# Altium PCB PCB1.PcbDoc
Units mm, origin at the board's own origin, x right, y up, seen from the top; angles counter-clockwise.
Board outline 17.78 x 60.96 mm, 2 copper layers (Top Layer, Bottom Layer), stack 1.595 mm thick; 74 components, 43 nets, 242 pads, 125 vias.
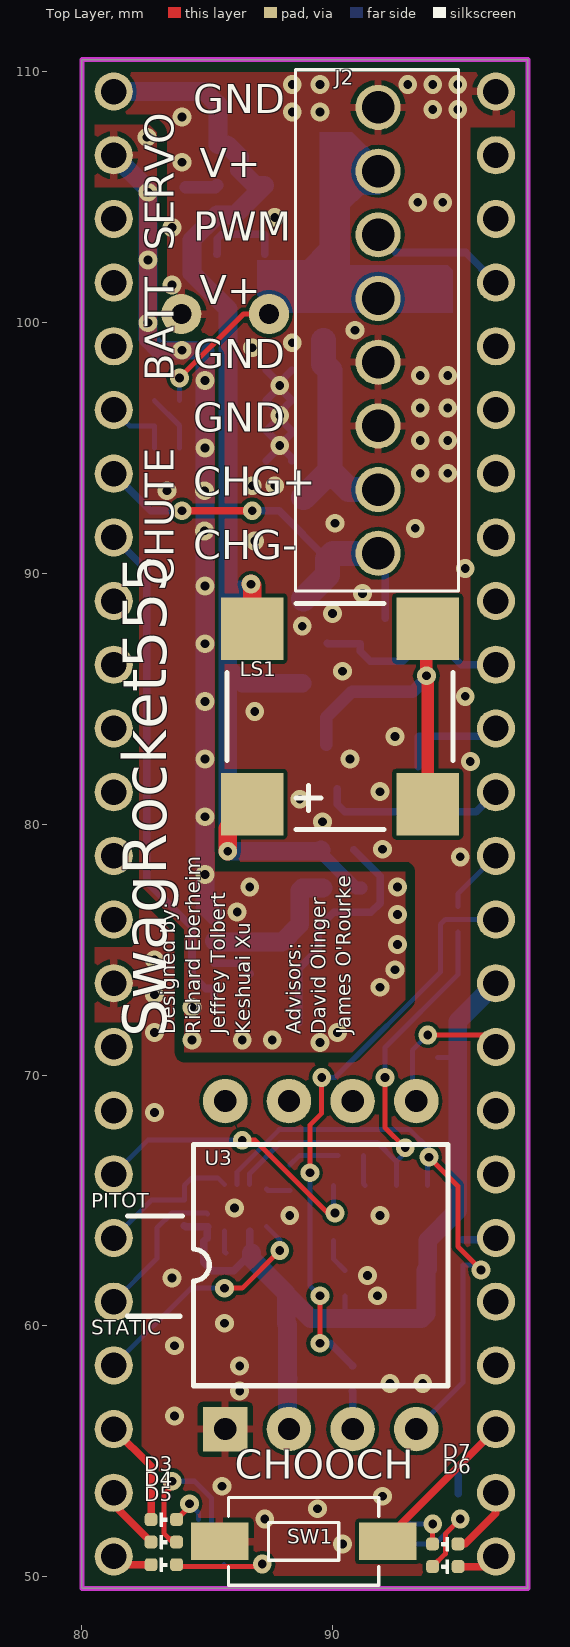
[diagram p0: Top Layer view]
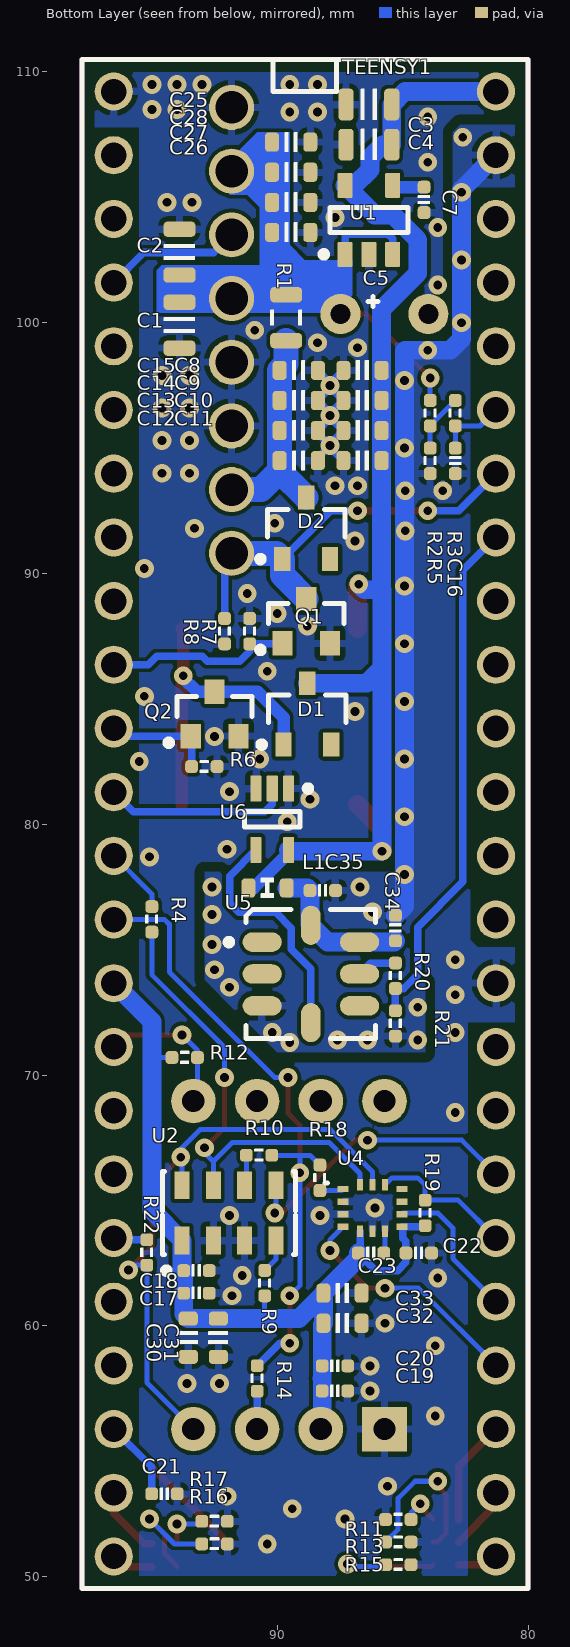
[diagram p1: Bottom Layer view, seen from below]
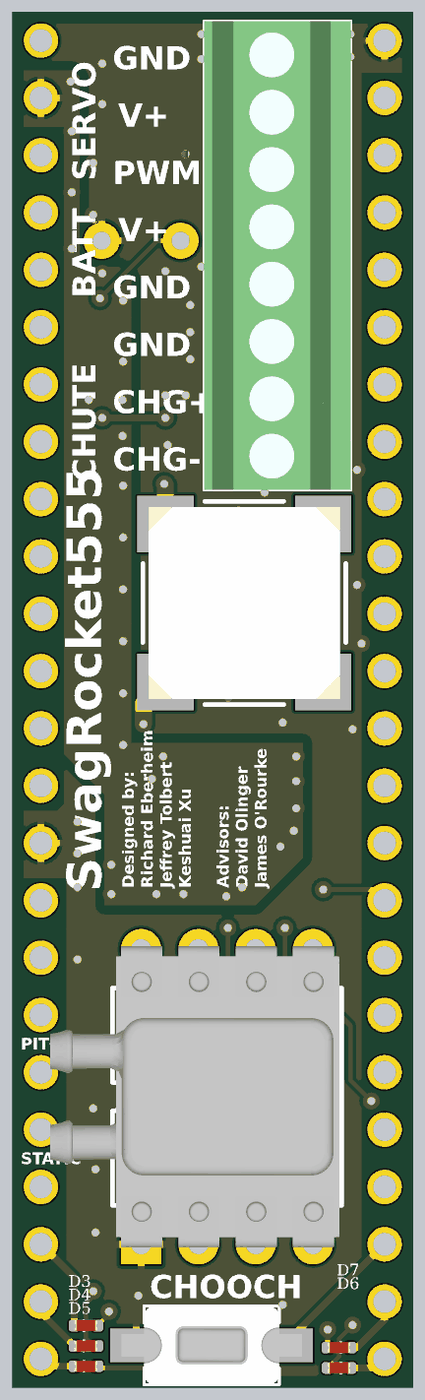
[diagram p2: 3D render of the assembled board from above, using the file's embedded part models]
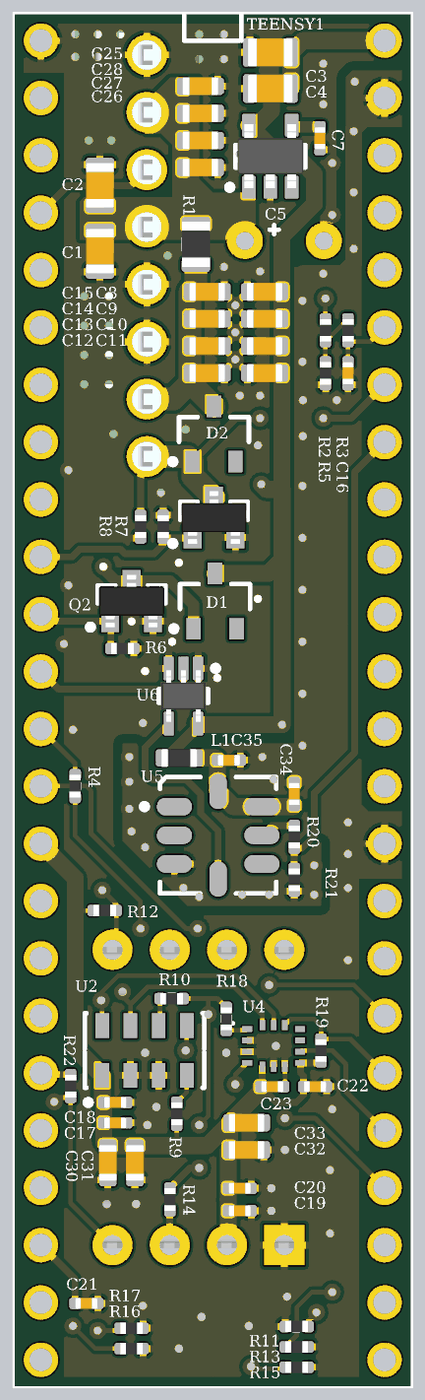
[diagram p3: 3D render of the assembled board from below, using the file's embedded part models]

## Layer stack, top to bottom
Top Solder: solder mask 0.0254, Solder Resist, Dk 3.5
Top Layer: signal copper 0.0356
Dielectric 1: dielectric 1.524, FR-4, Dk 4.8
Bottom Layer: signal copper 0.0356
Bottom Solder: solder mask 0.0102, Solder Resist, Dk 3.5

## Board outline
80.01,49.53 97.79,49.53 97.79,110.49 80.01,110.49

## Design rules (kind name [scope] priority, off if disabled: settings)
BoardOutlineClearance [InNetClass('All Nets')] p1: gap=0.381 ignorepadtopadclearanceinfootprint=FALSE
Clearance BoardEdge [All vs OnLayer('Keep-Out Layer')] p1: gap=0.4 ignorepadtopadclearanceinfootprint=FALSE
Clearance "Stitching GND" [IsStitchingVia and InNet('GND') vs (IsVia and (Not IsStitchingVia)) Or IsPad] p2 off: gap=0.127 ignorepadtopadclearanceinfootprint=FALSE except(0: Arc-Hole Track-Hole SMDPad-Hole THPad-Hole Via-Hole Fill-Hole Poly-Hole Region-Hole Text-Hole)
Clearance Clearance_outlinepolygon [inPolygon vs OnLayer('Keep-Out Layer')] p3 off: gap=0.4 ignorepadtopadclearanceinfootprint=FALSE except(0: Arc-Hole Track-Hole SMDPad-Hole THPad-Hole Via-Hole Fill-Hole Poly-Hole Region-Hole Text-Hole)
Clearance Clearance-polygonpolygon [InPolygon vs InPolygon] p4: gap=0.4 ignorepadtopadclearanceinfootprint=FALSE
Clearance Clearance_2 [All] p5: gap=0.152 ignorepadtopadclearanceinfootprint=FALSE except(0: Arc-Hole Track-Hole SMDPad-Hole THPad-Hole Via-Hole Fill-Hole Poly-Hole Region-Hole Text-Hole)
ComponentClearance [InComponentClass('no-clearance-check')] p1: gap=-999 collisioncheckmode=3 verticalgap=-999 showdistances=FALSE
ComponentClearance ComponentClearance_4 [All] p2: gap=0.254 collisioncheckmode=3 verticalgap=0.254 showdistances=FALSE
HoleSize [All] p1: absolutevalues=TRUE maxlimit=6 minlimit=0.33 maxpercent=80.000 minpercent=20.000
MinimumAnnularRing ignore [(HasFootprint('LMZ21701SIL') OR HasFootprint('m3 hole') OR HasFootprint('G3T-12AH'))] p1: minimumring=0
MinimumAnnularRing [All] p2: minimumring=0.178
MinimumSolderMaskSliver [All] p1: minsoldermaskwidth=0.076
NetAntennae [All] p1: netantennaetolerance=2
PolygonConnect PolygonConnect_heat [IsVia OR InPolygonClass('nothermalrelief') OR InPadClass('heatsink')] p1: connectstyle=Direct reliefconductorwidth=0.254 reliefentries=4 polygonreliefangle="90 Angle" airgapwidth=0.254
PolygonConnect [All] p2: connectstyle=Relief reliefconductorwidth=0.3 reliefentries=4 polygonreliefangle="90 Angle" airgapwidth=0.2
RoutingVias [All] p1: holewidth=0.711 width=1.27 viastyle="Through Hole" minholewidth=0.711 minwidth=1.27 maxholewidth=0.711 maxwidth=1.27 useviatemplates=TRUE viatemplateguid#1={7AE0D67D-3FC4-421B-A70A-BCEE4CC15F0C} viatemplatename#1=signal
SilkToSilkClearance [All] p1 off: silktosilkclearance=0
SilkToSolderMaskClearance SilkToSolderMaskClearance_1 [HasFootprint('PAD-JUMPER-2-NO_YES_SILK')] p1: minsilkscreentomaskgap=0 clearancetoexposedcopper=TRUE
SilkToSolderMaskClearance [IsPad] p2: minsilkscreentomaskgap=0.15 clearancetoexposedcopper=TRUE
SolderMaskExpansion [All] p1: expansion=0.076
Width Width_1 [InNetClass('CI')] p1: maxlimit=10 minlimit=0.15 preferedwidth=0.2 impedancedriven=TRUE minimp=90.000000 maximp=110.000000 favimp=100.000000
Width [All] p2: maxlimit=25.375 minlimit=0.152 preferedwidth=0.3
24 further rules are at their usual default settings.

## Classes and differential pairs
net class CI: MISO MOSI SCK

## Components (designator, comment, footprint, x,y, rotation, side; value= is the part's Value field where it differs from the comment)
C1 "Cap_0805" CAP_0805 93.9,99.9 r90 bottom value=10uf
C2 "Cap_0805" CAP_0805 93.9,102.814 r270 bottom value=10uf
C3 "Cap_0805" CAP_0805 86.346,108.7 r180 bottom value=4.7uf
C4 "Cap_0805" CAP_0805 86.346,107.1 r180 bottom value=4.7uf
C5 "Cap_Tan_2917" OFF_BOARD_CAP_3.5MM 87.475,100.35 r180 bottom value=?F
C7 "Cap_0402" CAP_0402 84.146,104.9 r90 bottom value=10nf
C8 "Cap_0603" CAP_0603 86.6,98.1 r180 bottom value=1uf
C9 "Cap_0603" CAP_0603 86.6,96.9 r180 bottom value=1uf
C10 "Cap_0603" CAP_0603 86.6,95.7 r180 bottom value=1uf
C11 "Cap_0603" CAP_0603 86.6,94.5 r180 bottom value=1uf
C12 "Cap_0603" CAP_0603 89.146,94.5 r0 bottom value=1uf
C13 "Cap_0603" CAP_0603 89.146,95.7 r0 bottom value=1uf
C14 "Cap_0603" CAP_0603 89.146,96.9 r0 bottom value=1uf
C15 "Cap_0603" CAP_0603 89.146,98.1 r0 bottom value=1uf
C16 "Cap_0402" CAP_0402 82.9,94.492 r90 bottom value=?F
C17 "Cap_0402" CAP_0402 93.225,61.3 r0 bottom value=104
C18 "Cap_0402" CAP_0402 93.225,62.2 r0 bottom value=104
C19 "Cap_0402" CAP_0402 87.7,57.4 r0 bottom value=104
C20 "Cap_0402" CAP_0402 87.7,58.4 r0 bottom value=104
C21 "Cap_0402" CAP_0402 94.5,53.3 r180 bottom value=104
C22 "Cap_0402" CAP_0402 84.36,62.9 r0 bottom value=104
C23 "Cap_0402" CAP_0402 86.26,62.9 r0 bottom value=104
C25 "Cap_0603" CAP_0603 89.446,107.2 r0 bottom value=1uf
C26 "Cap_0603" CAP_0603 89.446,103.6 r0 bottom value=1uf
C27 "Cap_0603" CAP_0603 89.446,104.8 r0 bottom value=1uf
C28 "Cap_0603" CAP_0603 89.446,106 r0 bottom value=1uf
C30 "Cap_0603" CAP_0603 93.55,59.525 r90 bottom value=1uf
C31 "Cap_0603" CAP_0603 92.35,59.525 r90 bottom value=1uf
C32 "Cap_0603" CAP_0603 87.4,60.1 r0 bottom value=1uf
C33 "Cap_0603" CAP_0603 87.4,61.3 r0 bottom value=1uf
C34 "Cap_0402" CAP_0402 85.286,75.858 r270 bottom value=104
C35 "Cap_0402" CAP_0402 88.186,77.358 r0 bottom value=104
D1 "Diode_SOD523" SOT95P240X120-3N 88.8,84.4 r90 bottom
D2 "Diode_SOD523" SOT95P240X120-3N 88.846,91.8 r90 bottom
D3 "LED_0402" LED_0402_RED 83.275,52.275 r0 top
D4 "LED_0402" LED_0402_RED 83.275,51.375 r0 top
D5 "LED_0402" LED_0402_RED 83.275,50.475 r0 top
D6 "LED_0402" LED_0402_RED 94.5,50.4 r180 top
D7 "LED_0402" LED_0402_RED 94.5,51.3 r180 top
J2 "691210910008" 691210910008 91.821,99.695 r270 top
L1 "Ind_0603" IND_0603 90.386,77.458 r180 bottom value=?H
LS1 "Buzzer CUI CSSJ4B20" "CUI Buzzer 8.5" 86.8,80.8 r90 top
Q1 "INFINEON MOSFET N-CH SOT-23-3" "INFINEON SOT-23-3" 88.846,88.1 r90 bottom
Q2 "INFINEON MOSFET N-CH SOT-23-3" "INFINEON SOT-23-3" 92.5,84.4 r90 bottom
R1 "Res_0805" RES_0805 89.646,100.2 r90 bottom value=4.7R
R2 "Res_0402" RES_0402 83.9,96.392 r90 bottom value=?K
R3 "Res_0402" RES_0402 82.9,96.392 r90 bottom value=?K
R4 "Res_0402" RES_0402 95,76.208 r270 bottom value=100R
R5 "Res_0402" RES_0402 83.9,94.492 r90 bottom value=?K
R6 "Res_0402" RES_0402 92.908,82.3 r0 bottom value=20K
R7 "Res_0402" RES_0402 91.1,87.7 r270 bottom value=20K
R8 "Res_0402" RES_0402 92.1,87.7 r90 bottom value=100k
R9 "Res_0402" RES_0402 90.5,61.7 r270 bottom value=20k
R10 "Res_0402" RES_0402 90.725,66.8 r180 bottom value=100R
R11 "Res_0402" RES_0402 85.175,52.275 r180 bottom value=?K
R12 "Res_0402" RES_0402 93.692,70.7 r0 bottom value=20k
R13 "Res_0402" RES_0402 85.175,51.375 r0 bottom value=?K
R14 "Res_0402" RES_0402 90.8,57.9 r90 bottom value=100R
R15 "Res_0402" RES_0402 85.175,50.475 r0 bottom value=?K
R16 "Res_0402" RES_0402 92.5,51.3 r0 bottom value=?K
R17 "Res_0402" RES_0402 92.5,52.2 r0 bottom value=?K
R18 "Res_0402" RES_0402 88.3,65.9 r90 bottom value=100R
R19 "Res_0402" RES_0402 84.1,64.5 r270 bottom value=20k
R20 "Res_0402" RES_0402 85.286,73.958 r270 bottom value=49.9k
R21 "Res_0402" RES_0402 85.286,72.058 r90 bottom value=33.2k
R22 "Res_0402" RES_0402 95.2,62.925 r270 bottom value=100R
SW1 "434121050816" 434121050816 88.85,51.4 r0 top
TEENSY1 "Teensy3.6 edge only" TEENSY3.6-EDGEONLY 96.52,109.22 r180 bottom locked
U1 "LP2992IM5-5.0" DBV0005A_N 86.346,104.1 r90 bottom
U2 "MS5607/5611" MS5611 91.925,64.5 r90 bottom
U3 "HSCDRRN160MDSA3" honeywell-hsc-DIP8 89.535,62.42 r90 top
U4 "LSM6DSM" LGA14L_DOT_INDICATOR 86.2,64.7 r180 bottom
U5 "ADXL78/AD22279" ADI-E-8-1_V 88.66,74.03 r180 bottom
U6 "CAHCT1G125QDCKRG4Q" DCK0005A_M 90.2,80.2 r270 bottom

## Footprints (in the part's own frame and the unit in brackets; to place one, negate y for a bottom-side part, rotate by r counter-clockwise, add the part's x,y. Pads: shape width x height; smd on the part's side, far side on the other; paste and mask are expansions set on the pad)
434121050816 [mm] "6.0*3.5mm vertical type, SMD, height 5.0mm, black actuator, 160gf, T&R"
  rect 2.3x1.5 smd: 1(-3.35,0) 2(3.35,0)
  silkscreen extent -3,-1.75 3,1.75, body extent -4,-1.75 4,1.75, height 5
691210910008 [mm] "2,54mm - modular - green - Horizontal wire entry - Cage clamp - 0,8mm2 wires - 08p"
  round 1.8 hole 1.3: 1(-8.89,0) 2(-6.35,0) 3(-3.81,0) 4(-1.27,0) 5(1.27,0) 6(3.81,0) 7(6.35,0) 8(8.89,0)
  silkscreen extent -10.39,-3.3 10.39,3.2, body extent -10.39,-3.3 10.39,3.2, height 8.75
ADI-E-8-1_V [mm] "LCC, 8-Leads, Body 5x5mm, Pitch 1.27mm"
  oval 1.56x0.78 smd: 1(-1.94,1.27) 2(-1.94,0) 3(-1.94,-1.27) 5(1.94,-1.27) 6(1.94,0) 7(1.94,1.27)
  oval 0.78x1.56 smd: 4(0,-1.94) 8(0,1.94)
  silkscreen extent -3.4,-2.58 2.58,2.58, body extent -2.5,-2.5 2.5,2.5, height 2.21
CAP_0402 [mil]
  rrect50% 20x20 smd: 1(-20,0) 2(20,0)
  silkscreen extent -7,-9 7,9, body extent -20,-10 20,10, height 20
CAP_0603 [mil]
  rrect50% 22x30 smd: 1(-30,0) 2(30,0)
  silkscreen extent -10,-15 10,15, body extent -31,-16 31,16, height 31
CAP_0805 [mil]
  rrect50% 24x50 smd: 1(-36,0) 2(36,0)
  silkscreen extent -12,-24 12,24, body extent -39,-25 39,25, height 39
"CUI Buzzer 8.5" [mm]
  rect 2.5x2.5 smd: 1(0,0) 2(0,-7) 3(7,-7) 4(7,0)
  silkscreen extent -1,-8 8,1, body extent -0.75,-7.75 7.75,0.75, height 3.2
DBV0005A_N [mm] "SOT23, 5-Leads, Body 3.05x1.75mm, Pitch 0.95mm, IPC Medium Density"
  rrect17% 1x0.6 smd: 1(-1.375,0.95) 2(-1.375,0) 3(-1.375,-0.95) 4(1.375,-0.95) 5(1.375,0.95)
  silkscreen extent -1.5,-1.55 0.5,1.93, body extent -1.42,-1.46 1.42,1.46, height 1.08
DCK0005A_M [mm] "SOT23, 5-Leads, Body 2.15x1.4mm, Pitch 0.65mm, IPC Low Density"
  rrect22% 1.05x0.45 smd mask+0.06: 1(-1.225,0.65) 2(-1.225,0) 3(-1.225,-0.65) 4(1.225,-0.65) 5(1.225,0.65)
  silkscreen extent -1.35,-1.1 0.3,1.55, body extent -1.14,-1 1.14,1, height 0.94
honeywell-hsc-DIP8 [mil]
  rect 70x70 hole 35: 1(-257.5,150)
  round 70 hole 35: 2(-257.5,50) 3(-257.5,-50) 4(-257.5,-150) 5(257.5,-150) 6(257.5,-50) 7(257.5,50) 8(257.5,150)
  silkscreen extent -190,-200 190,304, body extent -263,-196 263,309, height 287
IND_0603 [mil]
  rrect50% 22x30 smd: 1(-30,0) 2(30,0)
  silkscreen extent -10,-15 10,15, body extent -31,-16 31,16, height 31
"INFINEON SOT-23-3" [mm] "SOT23, 3-Leads, Body 2.90x2.40mm, Pitch 0.95mm, IPC Medium Density"
  rect 0.972x0.802 smd: 1(-0.885,0.95) 2(0.885,0) 3(-0.885,-0.95)
  silkscreen extent -1.27,-1.5 0.7,1.95, body extent -1.16,-1.45 1.16,1.45, height 1
LED_0402_RED [mil]
  rrect50% 20x20 smd: 1(-20,0) 2(20,0)
  silkscreen extent -6,-11 6,10, body extent -20,-10 20,10, height 18
LGA14L_DOT_INDICATOR [mm] "LGA14L_DOT_INDICATOR"
  rect 0.45x0.25 smd: 1(-1.175,0.75) 2(-1.175,0.25) 3(-1.175,-0.25) 4(-1.175,-0.75) 8(1.175,-0.75) 9(1.175,-0.25) 10(1.175,0.25) 11(1.175,0.75)
  rect 0.25x0.45 smd: 5(-0.5,-0.925) 6(0,-0.925) 7(0.5,-0.925) 12(0.5,0.925) 13(0,0.925) 14(-0.5,0.925)
  silkscreen extent -1.9,1 -1.8,1, body extent -1.5,-1.25 1.5,1.25, height 0.83
MS5611 [mm] "QFN, 8-Leads, Body 3.00x5.00mm, Pitch 1.25mm, Thermal Pad 0.00x0.00mm, IPC Medium Density"
  rect 1.1x0.6 smd: 1(-1.1,1.875) 2(-1.1,0.625) 3(-1.1,-0.625) 4(-1.1,-1.875) 5(1.1,-1.875) 6(1.1,-0.625) 7(1.1,0.625) 8(1.1,1.875)
  silkscreen extent -2.42,-2.65 1.65,2.65, body extent -1.5,-2.5 1.5,2.5, height 1
OFF_BOARD_CAP_3.5MM [mm]
  round 1.6 hole 0.8: 1(0,0) 2(3.5,0)
  silkscreen extent 1.1,0.3 1.5,0.7
RES_0402 [mil]
  rrect50% 20x20 smd: 1(-20,0) 2(20,0)
  silkscreen extent -7,-10 7,10, body extent -20,-10 20,10, height 14
RES_0805 [mil]
  rrect50% 24x50 smd: 1(-36,0) 2(36,0)
  silkscreen extent -12,-24 12,24, body extent -39,-25 39,25, height 24
SOT95P240X120-3N [mm] "SOT23, 3-Leads, Body 2.93x2.40mm, Pitch 0.95mm, IPC Medium Density"
  rect 0.95x0.65 smd: 1(-1.225,0.95) 2(-1.225,-0.95) 3(1.225,0)
  silkscreen extent -1.35,-1.55 0.75,1.95, body extent -0.75,-1.56 0.75,1.57, height 1.2
TEENSY3.6-EDGEONLY [mil]
  round 60 hole 40: 0(0,-100) 1(0,-200) 2(0,-300) 3(0,-400) 3.3V1(0,-1400) 3.3V2(600,-200) 4(0,-500) 5(0,-600) 6(0,-700) 7(0,-800) 8(0,-900) 9(0,-1000) 10(0,-1100) 11(0,-1200) 12(0,-1300) 13(600,-1300) 14(600,-1200) 15(600,-1100) 16(600,-1000) 17(600,-900) 18(600,-800) 19(600,-700) 20(600,-600) 21(600,-500) 22(600,-400) 23(600,-300) 24(0,-1500) 25(0,-1600) 26(0,-1700) 27(0,-1800) 28(0,-1900) 29(0,-2000) 30(0,-2100) 31(0,-2200) 32(0,-2300) 33(600,-2300) 34(600,-2200) 35(600,-2100) 36(600,-2000) 37(600,-1900) 38(600,-1800) 39(600,-1700) A21(600,-1600) A22(600,-1500) AGND(600,-100) GND1(0,0) GND2(600,-1400) VIN(600,0)
  silkscreen extent -50,-2350 650,50, body extent -50,-2350 650,50, height 602

## Part data
C1 C2 C3 C4 C5 C7 C8 C9 C10 C11 C12 C13 C14 C15 C16 C17 C18 C19 C20 C21 C22 C23 C25 C26 C27 C28 C30 C31 C32 C33 C34 C35: "Capacitor"
D1 D2: "Diode", url=http://www.digikey.com/product-detail/en/nxp-usa-inc/PMEG2010AEB,115/568-6502-1-ND/2531789
D3 D4 D5 D6 D7: "LED"
J2: "WR-TBL Terminal Blocks Serie 2109 - 2.54 mm with Rising Cage Clamp", Manufacturer="Würth Elektronik eiSos GmbH", ComponentLink1 Description=Manufacturer, ComponentLink1URL=http://www.we-online.com, ComponentLink2 Description=Datasheet, ComponentLink2URL=http://katalog.we-online.de/em/datasheet/6912109100xx.pdf, Created by="Karrer Zheng", Created Date="8 Novenber 2013", NoPins=8, partNo=691210910008
L1: "Inductor"
LS1: library part CSS-J4B20
R1 R2 R3 R4 R5 R6 R7 R8 R9 R10 R11 R12 R13 R14 R15 R16 R17 R18 R19 R20 R21 R22: "Resistor"
SW1: library part CMP-1459-00007-1, "WS-TASV SMD Tact Switch 6.0X3.5 mm", Manufacturer="Wuerth Elektronik", ComponentLink1Description="Manufacturer URL", ComponentLink1URL=http://www.we-online.com, ComponentLink2Description=Datasheet, ComponentLink2URL=http://katalog.we-online.de/em/datasheet/434121050816.pdf, NoPins=02, PackageReference=434121050816, PartNumber=434121050816
U1: library part CMP-0062-02178-3, "Micropower 250 mA Low-Noise Ultra Low-Dropout Regulator, 5-pin SOT-23", Manufacturer="Texas Instruments", PackageTopMarking=LFFB*XTT, PowerWise=N, ComponentLink1Description="Datasheet URL", ComponentLink1URL=http://www.ti.com/general/docs/lit/getliterature.tsp?genericPartNumber=LP2992&fileType=pdf, CompType="LDO IC", PackageDescription="Molded SOT-23, .115 x .063 x .040 in Body, 5 Lead, .0375 in Pitch", PackageReference=DBV0005A, PinCount=5, RoHS=N
U2: library part MS5611
U3: library part honeywell-hsc-spi
U4: library part LSM6DS3
U5: library part ADXL78
U6: library part CMP-0859-00347-3, "Automotive Catalog Single Bus Buffer Gate With 3-State Output, DCK0005A, LARGE T&R", F @ Nom Voltage(Max)(Mhz)=75, Generic Part Number=SN74AHCT1G125-Q1, ICC @ Nom Voltage(Max)(mA)=0.01, Manufacturer="Texas Instruments", Operating Temperature Range(C)="-40 to 125", Rating=Automotive, tpd @ Nom Voltage(Max)(ns)=6, Voltage(Nom)(V)=5, 3-State Output=Yes, Bits(#)=1, DatasheetVersion=SCLS504B, Input Type=CMOS, Logic=True, Output Drive (IOL/IOH)(Max)(mA)=8/-8, Output Type=CMOS, PackageReference=DCK0005A, PartId=1, Schmitt Trigger=No, Sub-Family="Non-Inverting Buffer/Driver", Technology Family=AHCT, VCC(Max)(V)=5.5, VCC(Min)(V)=3

## Via types
v1: diameter 0.75, hole 0.35, Top Layer to Bottom Layer, tented both sides, 125 vias

## Nets (pads, with @x,y where several pads share a name; then routed paths per layer and width w, separated by ;. In a path a pad name is that pad's centre, name@x,y a point inside that pad or via, vN(x,y) a via of type N, cw(c..) or ccw(c..) an arc to the next point about the centre after c; other vN are vias at no path point)
ADXL_OUT: R20.2 R21.2 TEENSY1.19 | length 20.7
  Bottom Layer w0.3: TEENSY1.19 82.6,90.12 82.6,77.7 84.4,75.9 84.4,74 84.95,73.45 R20.2 R21.2
ADXL_ST: TEENSY1.10 U6.2 | length 7.4
  Bottom Layer w0.3: U6.2 90.2,80.8 90.5,80.5 95.74,80.5 TEENSY1.10
AGND: C16.1 C34.1 C35.1 R5.1 R21.1 TEENSY1.AGND U5.3 | length 33.1
  Bottom Layer w0.5: 84.907,93.984 84.923,94
  Bottom Layer w0.75: TEENSY1.AGND 82.648,105.312 v1(82.648,105.2) v1(82.648,102.5) v1(82.648,100) 82.648,99.352 83.1,98.9 v1(84,98.9) 84.9,98.9 84.923,98.877 v1(84.923,97.7) v1(84.923,95) 84.923,94 v1(84.923,89.5) v1(84.923,87.2) v1(84.923,84.9) v1(84.923,82.6) v1(84.923,80.3) v1(84.923,78) 84.923,76.729 C34.1
  other v1: 89.5,71.3 84.4,71.4 86.4,71.4 87.6,71.4 90.2,71.7 84.4,72.7 91.9,73.5 92.5,74.2 92.6,75.2 92.6,76.4 86.2,76.5 86.7,77.5 92.6,77.5 84.9,91.7 83.4,93.3 84.9,93.3 82.6,107.4
BUTTON1: C21.1 SW1.2 TEENSY1.30 | length 9.8
  Top Layer w0.3: SW1.2 92.2,51.56 TEENSY1.30 TEENSY1.30@96.52,55.52
  Bottom Layer w0.3: C21.1 95.008,54.368 TEENSY1.30
BUZZ: Q2.1 R6.2 TEENSY1.9 | length 4.4
  Bottom Layer w0.3: R6.2 93.416,83.481 Q2.1 96.215,83.515 TEENSY1.9
CHARGE: Q1.1 R7.2 TEENSY1.8 | length 7.4
  Bottom Layer w0.3: Q1.1 89.819,87.192 R7.2 91.1,86.9 91.5,86.5 92.8,86.5 93,86.7 94.8,86.7 95.14,86.36 TEENSY1.8
CHARGE_SENSE: D2.1 J2.8 Q1.2 R8.2 TEENSY1.20 | length 16.7
  Top Layer w0.3: v1(84,92.5) v1(86.8,92.5)
  Bottom Layer w0.3: TEENSY1.20 82.76,92.5 v1(84,92.5) ; v1(86.8,92.5) 87.871,92.5 D2.1 ; J2.8 92.1,90.526 R8.2
  Bottom Layer w1: Q1.2 89.796,89.935 D2.1 90.026,90.805 J2.8
CS_HSC: R12.1 TEENSY1.24 U3.5 | length 5.9
  Top Layer w0.2: v1(93.8,71.6) 96.04,71.6 TEENSY1.24
  Bottom Layer w0.2: U3.5 93.184,69.122 R12.1 93.184,70.984 v1(93.8,71.6)
CS_LSM: R19.1 TEENSY1.38 U4.12 | length 5.9
  Bottom Layer w0.2: TEENSY1.38 82.788,65.008 R19.1 84.1,65.6 84.4,65.9 85.425,65.9 U4.12
CS_MS: R9.1 TEENSY1.39 U2.4 U2.5 | length 13.1
  Top Layer w0.2: v1(86.4,67.4) 86.913,67.4 89.813,64.5 v1(90.1,64.5)
  Bottom Layer w0.2: TEENSY1.39 82.64,67.4 v1(86.4,67.4) ; U2.4 90.05,62.658 R9.1 ; U2.5 90.05,64.55 v1(90.1,64.5)
GND: C1.1 C2.1 C3.1 C4.1 C5.2 C7.1 C8.1 C9.1 C10.1 C11.1 C12.1 C13.1 C14.1 C15.1 C17.1 C18.1 C19.1 C20.1 C21.2 C22.1 C23.1 C25.1 C26.1 C27.1 C28.1 C30.1 C31.1 C32.1 C33.1 J2.1 J2.5 J2.6 Q1.3 Q2.3 R6.1 R7.1 R8.1 R11.1 R13.1 R15.1 R16.1 R17.1 SW1.1 TEENSY1.GND1 TEENSY1.GND2 U1.2 U2.2 U2.3 U3.1 U4.2 U4.3 U4.6 U4.7 U6.1 U6.3 | length 10.4
  Bottom Layer w0.2: U4.7 85.7,62.952 C23.1
  Bottom Layer w0.3: C11.1 87.9,95.038 v1(87.9,95.1) ; C8.1 v1@87.9,97.562 ; C12.1 88.384,94.616 v1(87.9,95.1) ; C15.1 87.9,97.616 v1@87.9,97.562 ; v1(87.9,95.1) 88.384,95.584 C13.1 87.9,96.184 v1@87.9,96.238 ; v1(87.9,95.1) 87.9,95.162 C10.1 v1@87.9,96.238 ; v1@87.9,96.238 v1(87.9,96.3) v1@87.9,96.362 ; v1@87.9,96.362 87.9,96.416 C14.1 87.9,97.384 v1@87.9,97.438 ; v1@87.9,96.362 C9.1 v1@87.9,97.438 ; v1@87.9,97.438 v1(87.9,97.5) v1@87.9,97.562
  other v1: 90.4,51.3 87.3,52.3 89.4,52.7 92,53.2 85.6,53.6 83.7,56.4 86.3,57.4 92.3,57.7 93.6,57.7 86.3,58.4 83.7,59.2 85.7,60.1 91.8,61.2 83.6,61.9 91.4,62 88.3,64.4 91.9,64.4 86.1,64.7 82.9,68.5 82.9,71.7 82.9,73.2 82.9,74.6 95.1,78.7 92,79 89.6,80.1 88.7,81 91.9,81.3 95.5,82.5 90.7,82.6 92.5,83.5 86.9,84.5 95.3,85.1 90.4,86.1 88.8,87.9 90,88.4 91.2,89.2 95.3,90.2 86.9,91.3 93.3,91.8 90.1,92 86.8,93.5 87.7,93.5 93.5,94 94.6,94 93.5,95.3 94.6,95.3 93.5,96.6 94.6,96.6 93.5,97.9 94.6,97.9 86.8,99 88.4,99.2 90.9,99.7 83.6,101.5 83.6,103.8 87.7,104.2 93.4,104.8 94.4,104.8 84,106.4 84,108.2 88.4,108.4 89.5,108.4 94,108.5 95,108.5 88.4,109.5 89.5,109.5 93,109.5 94,109.5 95,109.5
LED1: D3.1 TEENSY1.35 | length 4.2
  Top Layer w0.3: TEENSY1.35 82.767,54.393 D3.1
LED2: D4.1 TEENSY1.34 | length 2.6
  Top Layer w0.3: TEENSY1.34 81.28,52.862 D4.1
LED3: D5.1 TEENSY1.33 | length 1.6
  Top Layer w0.3: TEENSY1.33 81.605,50.475 D5.1
LED4: D6.1 TEENSY1.32 | length 1.7
  Top Layer w0.3: D6.1 96.12,50.4 TEENSY1.32
LED5: D7.1 TEENSY1.31 | length 2.8
  Top Layer w0.3: D7.1 95.3,51.3 96.52,52.52 TEENSY1.31
LSM_INT1: TEENSY1.36 U4.4 | length 9.7
  Top Layer w0.2: v1(85.7,61.5) 86.4,61.5 v1(87.9,63)
  Bottom Layer w0.2: TEENSY1.36 84.36,61.5 v1(85.7,61.5) ; U4.4 87.9,63.425 v1(87.9,63)
LSM_INT2: TEENSY1.37 U4.9 | length 5.9
  Bottom Layer w0.2: TEENSY1.37 83,62.68 83,63.9 83.598,64.498 84.977,64.498 U4.9
MISO: R10.2 R14.2 R18.2 TEENSY1.12 | length 26.7
  Top Layer w0.2: v1(89.1,66.1) 89.1,68 89.57,68.47 v1(89.57,69.9) ; v1(89.5,59.3) v1(89.5,61.2)
  Bottom Layer w0.2: R18.2 88.692,66.8 89.1,66.8 ; v1(89.5,61.2) 89.1,61.6 v1(89.1,66.1) 89.1,66.8 ; v1(89.57,69.9) 90.1,69.9 94.3,74.1 94.3,76 94.506,76.206 96.52,76.206 TEENSY1.12 TEENSY1.12@95.87,76.2 ; R10.2 89.1,66.8
  Bottom Layer w0.3: v1(89.5,59.3) 89.908,59.3 R14.2
MOSI: R4.2 U2.7 U4.14 | length 18.9
  Top Layer w0.2: v1(92.1,69.9) 92.1,67.9 v1(92.9,67.1)
  Bottom Layer w0.2: U4.14 86.7,66.075 87.931,67.306 91.794,67.306 92.55,66.55 ; v1(92.1,69.9) 92.1,71.1 95,74 R4.2 ; U2.7 92.55,66.55 ; v1(92.9,67.1) 92.9,66.9 92.55,66.55
NetC7_2: C7.2 U1.4 | length 1.3
  Bottom Layer w0.5: C7.2 85.329,105.408 U1.4
NetC12_2: C12.2 C13.2 C14.2 C15.2 D2.3 J2.7 R1.1 | length 9
  Bottom Layer w1: D2.3 89.908,94.087 ; R1.1 89.646,98.362 C15.2 C14.2 C13.2 C12.2 89.908,94.087 ; J2.7 90.65,93.345 89.908,94.087
NetD1_1: D1.1 LS1.2 LS1.3 Q2.2 | length 12.9
  Top Layer w0.5: LS1.2 93.8,85.875 v1(93.75,85.925) 93.75,87.75 LS1.3
  Bottom Layer w0.5: D1.1 89.75,84.25 90.785,85.285 Q2.2 93.21,85.285 93.75,85.825 v1(93.75,85.925)
NetD3_2: D3.2 R11.2 | length 1.6
  Top Layer w0.2: D3.2 84.3,52.792 v1(84.3,52.9)
  Bottom Layer w0.2: v1(84.3,52.9) 84.667,52.533 R11.2
NetD4_2: D4.2 R13.2 | length 6.7
  Top Layer w0.2: v1(83.6,53.8) 83.6,53.6 83.277,53.277 83.277,51.723 83.625,51.375 D4.2
  Bottom Layer w0.2: v1(83.6,53.8) 84.5,53.8 85.177,53.123 85.177,51.881 R13.2
NetD5_2: D5.2 R15.2 | length 4.9
  Top Layer w0.2: D5.2 83.86,50.398 87.098,50.398 v1(87.2,50.5)
  Bottom Layer w0.2: R15.2 85.758,50.4 v1@87.1,50.4
NetD6_2: D6.2 R16.2 | length 4.9
  Top Layer w0.2: D6.2 94.5,50.908 94.5,51.7 v1(95.1,52.3)
  Bottom Layer w0.2: R16.2 94.1,51.3 v1(95.1,52.3)
NetD7_2: D7.2 R17.2 | length 1.8
  Top Layer w0.2: D7.2 93.992,52.092 v1(94,52.1)
  Bottom Layer w0.2: R17.2 93.108,52.1 v1(94,52.1)
NetR2_1: R2.1 R3.2 R5.2 | length 2.3
  Bottom Layer w0.2: R3.2 83.9,95.9 R2.1 R5.2
NetR4_1: R4.1 TEENSY1.11 | length 2.7
  Bottom Layer w0.2: R4.1 95,77.22 TEENSY1.11
NetR10_1: R10.1 U2.6 | length 1.2
  Bottom Layer w0.2: R10.1 91.233,65.667 U2.6
NetR14_1: R14.1 U3.3 | length 1.5
  Bottom Layer w0.3: R14.1 90.805,57.387 U3.3
NetR18_1: R18.1 U4.1 | length 0.9
  Bottom Layer w0.2: 87.908,65.392 R18.1
  Bottom Layer w0.203: U4.1 87.433,65.392 87.908,65.392
NetR20_1: R20.1 U5.6 | length 1.6
  Bottom Layer w0.3: R20.1 86.284,74.466 U5.6
NetR22_1: R22.1 TEENSY1.27 | length 1.3
  Bottom Layer w0.3: R22.1 96.453,63.433 TEENSY1.27
NetU5_4: U5.4 U6.4 | length 9.5
  Bottom Layer w0.3: U5.4 88.66,74.232 89.436,75.008 89.436,75.858 90.061,76.483 91.536,76.483 91.9,76.847 91.9,77.925 U6.4
SCK: R22.2 U2.8 U3.4 U4.13 | length 24.1
  Top Layer w0.2: v1(93.85,66.725) 95,65.575 95,63.158 v1(95.93,62.228)
  Bottom Layer w0.2: U4.13 86.2,66.141 87.879,67.82 93.08,67.82 93.85,67.05 v1(93.85,66.725) 93.8,66.675 U2.8 ; U3.4 95.2,57.735 R22.2 95.733,62.417 95.922,62.228 v1(95.93,62.228)
SERVO: J2.3 TEENSY1.2 | length 5.5
  Bottom Layer w0.3: J2.3 92.526,102.8 95.32,102.8 TEENSY1.2
VCC: C17.2 C18.2 C19.2 C20.2 C22.2 C23.2 C30.2 C31.2 C32.2 C33.2 R9.2 R12.2 R19.2 TEENSY1.3.3V1 TEENSY1.3.3V2 U2.1 U3.2 U4.5 U4.8 | length 35.4
  Bottom Layer w0.2: 90.5,60.287 R9.2 ; R12.2 95,70.7
  Bottom Layer w0.3: R19.2 84.142,63.95 U4.8 85,63.925 85,63.5 84.868,63.368 C22.2 84.868,62.532 85.2,62.2 86.068,62.2 C23.2 86.7,62.968 U4.5
  Bottom Layer w0.75: C23.2 86.768,62.694 C33.2 C33.2@88.162,61.262 ; 88.225,57.9 88.208,57.917 ; U3.2 88.208,55.937 C19.2 88.208,57.917 ; TEENSY1.3.3V1 95,72.14 95,70.7 95,64.6 U2.1 93.8,62.267 C18.2 C17.2 93.733,60.47 C30.2 C31.2 90.5,60.287 89.137,60.287 C33.2@88.162,61.262 ; C33.2@88.162,61.262 C32.2 88.208,60.054 C20.2 88.208,57.917
VCC_5: C3.2 C4.2 C8.2 C9.2 C10.2 C11.2 D1.3 L1.1 LS1.1 LS1.4 TEENSY1.VIN U1.5 U6.5 | length 51.9
  Top Layer w0.75: v1(85.825,78.925) 85.825,79.825 LS1.1 ; v1(86.75,89.575) 86.8,89.525 LS1.4
  Bottom Layer w0.5: U6.5 89.55,78.85 90.942,77.458 L1.1
  Bottom Layer w0.75: TEENSY1.VIN 84.912,109.22 C3.2 C4.2 85.8,107.1 86.3,106.6 86.3,106.1 86.925,105.475 U1.5 86.121,104.3 85.4,104.3 84.4,103.3 84.4,101.975 85.838,100.537 C8.2 C9.2 C10.2 C11.2 85.838,89.363 85.825,89.35 ; v1(86.75,89.575) 86.525,89.35 85.825,89.35 ; D1.3 86.425,85.625 85.825,86.225 ; U6.5 89.5,78.925 v1(85.825,78.925) 85.825,86.225 ; 85.825,86.225 85.825,89.35
VCC_5A: C34.2 C35.2 L1.2 U5.7 U5.8 | length 6
  Bottom Layer w0.75: C34.2 85.336,75.3 U5.7 87.99,75.3 U5.8 88.694,76.004 C35.2 88.794,77.458 L1.2
VIN: C1.2 C2.2 C5.1 C25.2 C26.2 C27.2 C28.2 J2.2 J2.4 R1.2 R2.2 U1.1 U1.3 | length 8.9
  Top Layer w0.2: v1(83.9,97.8) 86.45,100.35 C5.1
  Bottom Layer w0.2: R2.2 v1(83.9,97.8)
  Bottom Layer w0.3: U1.3 85.4,102.729 85.4,103.342 85.585,103.527 87.273,103.527 87.296,103.504 U1.1
VIN_SENSE: C16.2 R3.1 TEENSY1.21 | length 2.8
  Bottom Layer w0.2: TEENSY1.21 81.916,95.884 R3.1 C16.2
pads on no net: D1.2 D2.2 TEENSY1.0 TEENSY1.1 TEENSY1.3 TEENSY1.4 TEENSY1.5 TEENSY1.6 TEENSY1.7 TEENSY1.13 TEENSY1.14 TEENSY1.15 TEENSY1.16 TEENSY1.17 TEENSY1.18 TEENSY1.22 TEENSY1.23 TEENSY1.25 TEENSY1.26 TEENSY1.28 TEENSY1.29 TEENSY1.A21 TEENSY1.A22 U3.6 U3.7 U3.8 U4.10 U4.11 U5.1 U5.2 U5.5

## Polygon pours and split planes (outlines as drawn)
AGND on Top Layer "AGND_L01_P004" (solid, pour order 4): 90.8,70.9 92.9,73 92.9,78.1 85.3,78.1 85.3,99.2 83,99.2 83,107.6 82.7,107.9 80.1,107.9 80.1,105.6 80.3,105.4 82.3,105.4 82.3,77.6 84.1,75.8 84.1,70.9
GND on Top Layer "GND_L01_P007" (solid, pour order 7): 80.01,49.53 97.79,49.53 97.79,110.49 80.01,110.49
AGND on Bottom Layer "AGND_L02_P002" (solid, pour order 2): 90,70.9 92.9,73.8 92.9,78.1 85.3,78.1 85.3,99.2 83,99.2 83,107.6 82.7,107.9 80.1,107.9 80.1,105.6 80.3,105.4 82.3,105.4 82.3,77.6 84.1,75.8 84.1,70.9
GND on Bottom Layer "GND_L02_P008" (solid, pour order 8): 80.01,49.53 97.79,49.53 97.79,110.49 80.01,110.49

## Keep-outs
Keep-Out Layer:
  the board outline again, w0.2

## Other copper
Top Layer:
  pour cut-out: 97.79,107.8 95.5,107.8 95.5,49.7 97.8,49.7
  pour cut-out: 80.01,105.1 82,105.1 82.3,104.8 82.3,75.4 82,75.1 80.01,75.1
  pour cut-out: 80,72.1 82.4,72.1 82.4,50.11 81.99,49.7 80,49.7
Bottom Layer:
  pour cut-out: 80,72.1 82.4,72.1 82.4,50.11 81.99,49.7 80,49.7
  pour cut-out: 80.01,105.1 82,105.1 82.3,104.8 82.3,75.4 82,75.1 80.01,75.1
  pour cut-out: 97.79,107.8 95.5,107.8 95.5,49.7 97.8,49.7
  region net VIN: 89.5,107.6 89.5,103.1 88.9,102.5 87,102.5 87,101.1 87.7,100.4 94.8,100.4 94.8,102.1 94.6,102.3 90.7,102.3 90.7,104.6 91.2,105.1 91.9,105.1 91.9,106.5 90.8,107.6 90.5,107.6

## Silkscreen, mask and mechanical layers (free items; w line width, h text height)
Top Overlay:
  text "GND" at 84.455,107.95 h2
  text "V+" at 84.709,105.41 h2
  text "SERVO" at 84.074,102.87 h2 r90
  text "PWM" at 84.455,102.87 h2
  text "V+" at 84.709,100.33 h2
  text "GND" at 84.455,97.79 h2
  text "BATT" at 84.074,97.663 h2 r90
  text "GND" at 84.455,95.25 h2
  text "CHG+" at 84.455,92.71 h2
  text "CHG-" at 84.455,90.17 h2
  text "CHUTE" at 84.074,89.535 h2 r90
  text "Designed by: / Richard Eberheim / Jeffrey Tolbert / Keshuai Xu /  / Advisors: / David Olinger / James O'Rourke" at 90.932,71.628 h1 r90
  text "SwagRocket555" at 83.947,71.501 h3 r90
  text "PITOT" at 80.391,64.516 h1
  text "STATIC" at 80.391,59.436 h1
  text "CHOOCH" at 86.1,53.5 h2